# Altium PCB Arduino_DUE_V02b.PcbDoc (part 2 of 3)
Units mil, origin at the board's own origin, x right, y up, seen from the top; angles counter-clockwise.
Board outline 4416.66 x 2112 mil, 4 copper layers (Top Layer, Mid-Layer 1, Mid-Layer 2, Bottom Layer); 129 components, 175 nets, 644 pads, 366 vias.
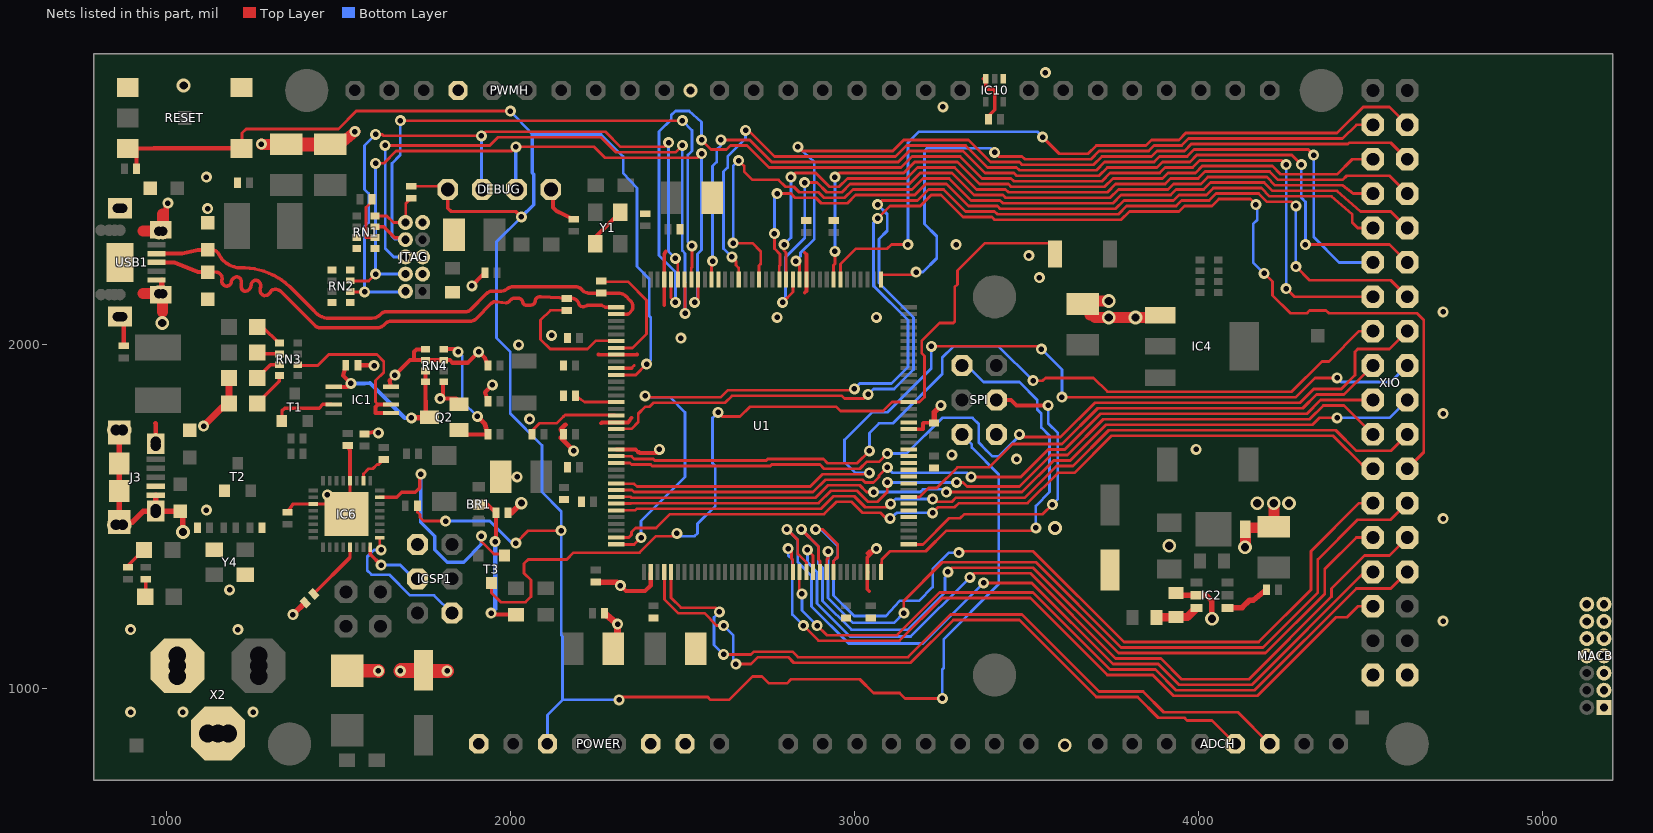
[diagram p4: the nets of this part, all layers, seen from the top]

## Via types
v1: diameter 32, hole 16, Top Layer to Bottom Layer, 313 vias
v2: diameter 40, hole 24, Top Layer to Bottom Layer, 52 vias
v3: diameter 36, hole 20, Top Layer to Bottom Layer, 1 vias

## Nets (pads, with @x,y where several pads share a name; then routed paths per layer and width w, separated by ;. In a path a pad name is that pad's centre, name@x,y a point inside that pad or via, vN(x,y) a via of type N, cw(c..) or ccw(c..) an arc to the next point about the centre after c; other vN are vias at no path point) (continued)
CMP: C31.2 IC1.5 Q2.3 RN4.3 RN4.4 | length 565.6
  Top Layer w8: IC1.5@1479.98,1877 IC1.5@1486.83,1877.35 ; Q2.3@1759.98,1787 Q2.3@1764.67,1789
  Top Layer w12: IC1.5@1479.98,1877 1525.98,1877 v1(1535.98,1887) 1513.39,1909.59 C31.2@1521.48,1940 ; RN4.3@1753.41,1923.25 RN4.4@1753.41,1891.76 1753.41,1891.57 1753.98,1787 Q2.3@1781.98,1787
  Top Layer w16: v1(1711.98,1787) 1753.98,1787 Q2.3@1759.98,1787
  Bottom Layer w12: v1(1535.98,1887) 1575.98,1887 1591.98,1888 1692.98,1787 v1(1711.98,1787)
D+: R6.1 U1.37 USB1.3 Z1.1 | length 1608.6
  Top Layer w10: Z1.1@1119.98,2211 1143.62,2211 cw(c1142.62,2191.64) 1161.98,2190.64 ccw(c1175.62,2184.64) 1169.62,2171 1169.98,2171 ccw(c1174.98,2184) 1187.98,2179 cw(c1205.98,2179) 1205.98,2197 cw(c1202.98,2182) 1217.98,2179 1217.98,2169 ccw(c1229.98,2167) 1227.98,2155 ccw(c1227.98,2173) 1245.98,2173 cw(c1260.98,2172) 1261.98,2187 cw(c1257.98,2171) 1273.98,2167 ccw(c1289.98,2159) 1281.98,2143 ccw(c1285.98,2161) 1303.98,2157 cw(c1316.71,2136.89) 1330.42,2156.35 1430.64,2056.45 ccw(c1447.44,2071.61) 1446.44,2049 1613.62,2049 ccw(c1613.62,2074) 1631.3,2056.32 1635.66,2060.68 cw(c1653.34,2043) 1653.34,2068 1882.62,2068 ccw(c1882.62,2093) 1900.3,2075.32 1944.66,2119.68 cw(c1956.92,2108.24) 1956.33,2125 1987.02,2121 ccw(c1985.02,2137.81) 1998.32,2127.34 cw(c2013.99,2115.67) 2011.16,2135 2019.98,2135 cw(c2021.98,2121) 2035.98,2123 ccw(c2045.98,2125) 2047.98,2115 2059.98,2115 ccw(c2059.98,2127) 2071.98,2127 cw(c2085.98,2125) 2087.98,2139 R6.1@2171.57,2135 ; R6.1@2161.98,2135 2163.48,2135 R6.1@2163.98,2134.5 R6.1@2171.57,2135 ; 2275.98,2109 2275.64,2109.34 ; U1.37@2307.78,2108.49 2301.98,2109 2276.46,2109 ; R6.1@2171.57,2135 2177.62,2135 cw(c2177.12,2111.21) 2194.3,2127.68 2197.66,2122.32 ccw(c2215.16,2125.93) 2205.33,2111 2211.08,2110 ccw(c2211.58,2125.55) 2213.87,2110.17 2221.71,2113.29 cw(c2225.42,2104) 2225.42,2114 2265.98,2114 2275.64,2109.34 ; 2275.64,2109.34 ccw(c2276.46,2110.16) 2276.46,2109 ; 2275.64,2109.34 ccw(c2276.46,2110.16) 2276.46,2109
  Top Layer w12: USB1.3@979.98,2239 USB1.3@971.28,2239 1023.98,2239 1091.98,2211 1119.98,2211 Z1.1@1119.98,2210.37
D-: R5.1 U1.38 USB1.2 Z2.1 | length 1600.1
  Top Layer w10: USB1.2@971.28,2264.59 982.99,2264.59 ccw(c982.99,2265.99) USB1.2@983.98,2265 ; Z2.1@1111.98,2275 Z2.1@1119.98,2275.63 ; Z2.1@1119.98,2275 1138.48,2275 cw(c1127.96,2248.38) 1154.33,2259.5 1161.33,2248.17 ccw(c1217.42,2297.78) 1213.56,2223 cw(c1220.74,2022.03) 1357.78,2169.21 ; 1357.77,2169.21 1429.34,2097.64 ccw(c1472.93,2132.41) 1466.69,2077 1597.47,2077 ccw(c1597.88,2111.04) 1621.66,2086.68 cw(c1641.75,2070) 1639.34,2096 1870.27,2096 ccw(c1871.34,2114.44) 1883.62,2100.64 1931.84,2148.86 cw(c1948.53,2131.23) 1949.19,2155.5 1973.46,2155.5 ccw(c1973.46,2180.5) 1988.73,2160.71 1992.73,2163.79 cw(c2006.54,2143.5) 2008.01,2168 2190.15,2168 cw(c2190.63,2144.47) 2209.46,2158.58 ccw(c2229.16,2175.18) 2231.16,2149.5 R5.1@2262.48,2149.5 ; U1.38@2307.78,2088.8 2338.8,2088.8 ccw(c2340.22,2097.89) 2345.64,2090.47 2354.32,2101.14 ccw(c2346.89,2106.57) 2355.98,2107.98 2355.98,2111.82 ccw(c2328.41,2109.58) 2346.32,2130.66 2336.91,2140.07 ; 2336.9,2140.08 ccw(c2314.59,2116.69) 2313.83,2149 2263.98,2149 R5.1@2263.98,2149.5 ; R5.1@2262.48,2149.5 R5.1@2263.98,2149.5 ; R5.1@2262.48,2149.5 2263.98,2147 R5.1@2263.98,2149.5
  Top Layer w12: USB1.2@973.98,2265 983.98,2265 1045.98,2265 1091.98,2275 1119.98,2275 Z2.1@1119.98,2275.63 Z2.1@1119.35,2275
DAC0(CANRX1): ADCH.5 U1.76 | length 2083.3
  Top Layer w8: U1.76@2447.55,1338.8 2447.98,1331 2447.98,1259 2487.98,1219 2563.98,1219 2599.98,1183 v1(2619.98,1183) ; v1(2655.98,1071) 2699.98,1071 2719.98,1091 2807.98,1091 2823.98,1075 3163.98,1075 3287.98,1199 3479.98,1199 3703.98,975 3823.98,975 3883.98,915 3959.98,915 3967.98,907 4039.98,907 ADCH.5@4107.98,839 ADCH.5@4103.98,843
  Bottom Layer w8: v1(2619.98,1183) 2647.98,1155 2647.98,1079 v1(2655.98,1071)
DAC1: ADCH.6 U1.77 | length 2180
  Top Layer w8: U1.77@2467.23,1338.8 2467.23,1263.75 2495.98,1235 2595.98,1235 v1(2607.98,1223) ; v1(2619.98,1099) 2699.98,1099 2707.98,1107 2819.98,1107 2835.98,1091 3155.98,1091 3279.98,1215 3487.98,1215 3711.98,991 3839.98,991 3899.98,931 4115.98,931 ADCH.6@4207.98,839
  Bottom Layer w8: v1(2607.98,1223) 2591.98,1207 2591.98,1127 v1(2619.98,1099)
EEXTINT: U1.25
EEXTINTA: MACB.8
EMDC: U1.123
EMDCA: MACB.14
EMDIO: U1.127
EMDIOA: MACB.12
EN: IC2.4 R10.2 | length 133.3
  Top Layer w16: IC2.4@4085.26,1233.6 4086.66,1235 4127.98,1235 4149.57,1256.59 4159.98,1256.59 R10.2@4198.48,1287
ERASE_CMD: IC6.23 T3.3 | length 700.9
  Top Layer w8: v1(1915.98,1443) 1915.98,1427 1951.98,1391 1978.98,1391 T3.3@1982.98,1387
  Top Layer w10: IC6.23@1620.44,1556.21 1669.19,1556.21 1683.98,1571 1723.98,1571 1735.98,1583 1735.98,1619 v1(1739.98,1623)
  Bottom Layer w10: v1(1739.98,1623) 1739.98,1483 1779.98,1443 1779.98,1403 1815.98,1367 1863.98,1367 1915.98,1419 v1(1915.98,1443)
ERASE_S: ERASE.2 T3.1 U1.130 | length 2610
  Top Layer w8: T3.1@1944.98,1307 1944.98,1278 1971.98,1251 2043.98,1251 2059.98,1267 2059.98,1315 2039.98,1335 2039.98,1363 2051.98,1375 2163.98,1375 2183.98,1395 2375.98,1395 2423.98,1443 2475.98,1443 v1(2483.98,1451) ; v1(2603.98,1803) 2615.98,1791 2667.98,1791 2695.98,1819 2947.98,1819 2959.98,1807 3083.98,1807 3109.88,1832.9 U1.130@3158.18,1832.9 3189.88,1832.9 3203.98,1847 3203.98,1967 3195.98,1975 3195.98,2011 3247.98,2063 3287.98,2063 3291.98,2067 3291.98,2167 3299.98,2175 3299.98,2215 3379.98,2295 3563.98,2295 3583.98,2275 ERASE.2@3583.98,2263
  Bottom Layer w8: v1(2483.98,1451) 2487.98,1451 2495.98,1443 2535.98,1443 2543.98,1451 2543.98,1479 2595.98,1531 2595.98,1647 2587.98,1655 2587.98,1787 v1(2603.98,1803)
ERX_DV: U1.119
ERX_DVA: MACB.10
ERX_ER: U1.122
ERX_ERA: MACB.13
ERXD0: U1.120
ERXD0A: MACB.9
ERXD1: U1.121
ERXD1A: MACB.11
ETX_CLK: U1.113
ETX_CLKA: MACB.1
ETX_EN: U1.114
ETX_ENA: MACB.3
ETXD0: U1.115
ETXD0A: MACB.5
ETXD1: U1.118
ETXD1A: MACB.7
FB: IC2.3 R11.1 R12.2 | length 126.7
  Top Layer w24: R12.2@3878.98,1207 3934.98,1207 R11.1@3935.98,1208 3969.11,1208 IC2.3@3994.7,1233.6
GATE_CMD: IC1.7 T1.3 | length 188.1
  Top Layer w8: IC1.7@1479.98,1826 IC1.7@1486.83,1826.17
  Top Layer w10: T1.3@1334.98,1778 1335.98,1779 1335.98,1807 1343.98,1815 1443.98,1815 1454.98,1826 IC1.7@1479.98,1826
GND: C1.- C2.- C3.- C4.1 C5.1 C6.1 C7.1 C8.1 C9.1 C10.1 C11.- C12.1 C13.1 C14.1 C15.1 C16.1 C17.1 C18.1 C19.1 C21.2 C22.2 C23.2 C24.2 C25.2 C26.2 C27.- C28.2 C29.- C30.1 C31.1 C32.1 C33.- C34.1 C35.- C36.2 C37.2 C38.2 C39.2 C40.2 C41.- D1.A D4.P$2 DEBUG.1 IC1.4 IC2.2 IC4.1 IC6.3 IC6.28 IC6.33 IC10.1 IC10.3 ICSP1.6 J3.P5 J3.P$1 J3.P$2 J3.P$3 J3.P$4 J3.P$5 J3.P$6 J3.P$7 J3.P$8 J3.S1 J3.S2 J3.S3 J3.S4 J3.S5 J3.S6 JTAG.3 JTAG.5 JTAG.9 L.C ON.C PC1.- PC2.- POWER.6 POWER.7 PWMH.7 Q2.2 R2.1 R7.1 R8.1 R11.2 R18.2 RESET.1 RESET.2 RN1.1 RN1.2 RN1.7 RN1.8 RN2.1 RN2.4 RN2.5 RN2.8 RN4.1 RN4.2 RN4.5 RN4.7 SPI.6 T2.3 U1.12 U1.33 U1.44 U1.46 U1.54 U1.58 U1.74 U1.106 U1.126 USB1.5 USB1.P$1 USB1.P$2 USB1.P$3 USB1.P$4 USB1.P$5 USB1.P$6 USB1.P$7 USB1.P$8 USB1.P$9 USB1.P$10 USB1.P$11 USB1.S1 USB1.S2 USB1.S3 USB1.S4 X2.1 X2.3 XIO.35 XIO.36 Y1.2 Y1.4 Y4.2 Y4.4 Z1.2 Z2.2 Z3.1 Z4.1 Z5.1 | length 6258.5
  Top Layer w8: RESET.2@1215.98,2771 RESET.2@1218.33,2747.58 ; R2.1@1597.48,2423 1597.48,2416.5 1579.98,2399 1579.98,2311 1580.23,2311.25 RN1.2@1606.55,2311.25 ; 2352.3,1931.32 2359.98,1939 ; U1.33@2447.55,2189.2 U1.33@2447.98,2195 ; 3047.98,1399 3055.98,1407 v1(3063.98,1407) ; U1.126@3158.18,1754.16 3159.82,1754.16 U1.126@3159.98,1754
  Top Layer w10: USB1.S2@983.09,2144.51 987.98,2147.5 USB1.P$10@987.98,2147 ; C36.2@1351.98,1512.5 1367.92,1536.53 IC6.3@1427.52,1536.53 1498.45,1536.53 1503.98,1531 1503.98,1527 IC6.33@1523.98,1507 ; IC6.33@1533.82,1507 IC6.28@1533.82,1603.46 ; U1.106@3038.1,1336.88 3038.1,1313.12 ; 3043.98,1283 3038.1,1288.88 3038.1,1313.12 ; v1(3063.98,1407) 3037.98,1381 3037.98,1313 3038.1,1313.12 ; IC10.3@3374.52,2772.46 IC10.3@3382.39,2772.46 3382.39,2748.59 3387.98,2743 3403.98,2743 3407.98,2739 3407.98,2683 3390.48,2665.5 C37.2@3390.48,2655
  Top Layer w11: 2255.98,1971 2256.29,1970.69 U1.44@2307.78,1970.69 2367.67,1970.69 2367.98,1971 ; 2263.98,1771 2266.82,1773.84 U1.54@2307.78,1773.84 2342.82,1773.84 2351.98,1787 ; U1.58@2307.78,1695.1 2363.88,1695.1 2371.98,1687 ; U1.46@2307.78,1931.32 2352.3,1931.32 ; 2373.98,1687 2375.98,1685 v1@2431.98,1685 ; U1.74@2408.18,1334.8 U1.74@2408.18,1338.8 ; 2447.48,2115 2447.48,2263 ; U1.33@2447.55,2189.2 2447.55,2243.07 2447.48,2263 ; 2451.98,2271 2447.48,2263 ; 2855.98,2151 2860.93,2155.95 U1.12@2860.93,2189.2 2860.93,2262.05 2855.98,2267 ; 3037.98,1393 3043.98,1399 3047.98,1399 ; U1.106@3038.1,1336.88 U1.106@3038.1,1338.8 ; U1.126@3151.98,1754 3159.98,1754 3199.98,1754 3199.98,1771 3201.48,1772.5 C8.1@3231.98,1772.5
  Top Layer w12: C28.2@875.98,1996.5 USB1.P$5@875.98,2068.56 ; C30.1@1526.98,1706.5 1533.82,1691.57 IC6.28@1533.82,1603.46 ; C31.1@1556.48,1940 1598.98,1940 v1(1603.98,1939) ; C38.2@1575.98,1740.5 1613.57,1748.59 v1(1615.98,1743) ; IC1.4@1653.17,1877.35 1649.17,1896.19 v1(1663.98,1911) 1707.73,1954.75 RN4.2@1753.41,1954.75 ; RN4.1@1753.41,1986.24 1727.22,1986.24 1719.98,1979 1719.98,1959 1723.98,1955 1753.15,1955 RN4.2@1753.41,1954.75 ; RN4.5@1806.55,1891.76 1804.74,1891.76 1803.98,1891 1803.98,1851 v1(1795.98,1843) 1842.69,1843 Q2.2@1851.29,1826.4 ; v1(1887.98,2171) 1917.98,2201 C25.2@1926.48,2209 ; C23.2@1934.48,1835 1926.39,1861.41 v1(1947.98,1883) ; C24.2@1934.48,1939 1926.39,1960.59 v1(1907.98,1979) 1875.98,1947 1831.98,1947 1824.23,1954.75 RN4.7@1806.55,1954.75 RN4.2@1753.41,1954.75 ; DEBUG.1@2117.98,2451 2123.98,2457 2123.98,2399 2134.39,2388.59 C22.2@2183.98,2364.5 ; Y1.2@2246.56,2293.72 2246.56,2311.44 Y1.4@2319.4,2384.28 ; v1(2319.98,1299) 2335.98,1283 2391.98,1283 2408.18,1299.2 U1.74@2408.18,1334.8 ; 2371.98,1687 2373.98,1687
  Top Layer w14: 967.98,1771 968.98,1770 J3.S3@968.98,1712 ; 2159.98,1767 2146.39,1753.41 C15.1@2154.48,1739 2146.39,1728.59 v1(2183.98,1691)
  Top Layer w16: J3.S1@862.98,1744 J3.S5@862.98,1654 J3.S6@862.98,1574 J3.S2@862.98,1484 900.98,1484 931.98,1515 967.98,1515 J3.S4@968.98,1516 ; J3.P5@968.98,1562 J3.S4@968.98,1516 ; USB1.P$10@979.98,2151 ccw(c979.48,2158.5) 986.98,2159 USB1.5@986.98,2187 ; USB1.P$8@983.98,2351 999.98,2351 v1@999.98,2411 ; v2(1047.98,1455) 1047.98,1503 Z4.1@1039.98,1515.63 1039.61,1516 J3.S4@968.98,1516 ; v1(1367.98,1215) R18.2@1403.61,1250.63 ; RN2.5@1534.55,2122.76 1535.98,2122.76 RN2.5@1535.98,2123 ; C34.1@1993.48,1511 2003.98,1511 v3(2031.98,1539) ; C10.1@2247.98,1309.5 2309.48,1309.5 v1(2319.98,1299) ; C8.1@3231.98,1772.5 3231.98,1803 v1(3251.98,1823) ; R11.2@3935.98,1278 3942.98,1271 IC2.2@3994.7,1271 4023.98,1271 4039.98,1255 v2(4039.98,1203)
  Top Layer w20: v1(1107.98,1763) 1161.64,1816.66 ON.C@1181.64,1829 L.C@1181.64,1903 ; C18.1@2273.48,1219 v1(2311.98,1187) 2311.98,1127.94 C1.-@2299.04,1115 ; v1@2317.57,1301.41 v1(2319.98,1299)
  Top Layer w24: USB1.P$8@983.98,2351 983.98,2379 987.98,2379
  Top Layer w32: 931.98,2330 987.98,2330 987.98,2379 ; X2.3@975.98,1067 X2.3@1091.98,1067 ; USB1.P$10@979.98,2151 cw(c976.48,2151.5) 975.98,2148 931.98,2148 USB1.P$10@987.98,2147 ; 987.98,2095 USB1.P$10@987.98,2147 ; USB1.P$10@987.98,2151 USB1.P$10@987.98,2147 ; X2.1@1147.98,811 X2.1@1147.98,927 ; v1(1275.98,2583) 1276.92,2582.06 C35.-@1344.92,2582.06 ; C27.-@1475.98,2582.06 1503.98,2583 v1(1547.98,2619) ; v2(3739.98,2127) 3679.98,2127 3675.04,2130.06 C29.-@3663.98,2118.06 3683.98,2107 3684.92,2086.06 3692.92,2086.06 3699.98,2079 v2(3739.98,2079) v2(3817.98,2079) 3887.98,2079 3887.98,2083 3888.98,2087 IC4.1@3889.98,2086 ; v2(4135.98,1411) 4136.94,1407.96 D4.P$2@4136.94,1463 4141.89,1466.06 C41.-@4219.98,1470.06 v2(4219.98,1539)
  Top Layer w40: USB1.S2@983.09,2144.51 ccw(c984.09,2148.4) USB1.P$10@987.98,2147.4 ; USB1.S1@983.09,2333.49 cw(c984.09,2329.6) 987.98,2330.6 USB1.P$8@987.98,2330 ; C35.-@1344.92,2582.06 C35.-@1347.98,2582.06 C27.-@1475.98,2582.06 ; D1.A@1525.98,1051.61 1615.37,1051.61 v1(1615.98,1051) ; PC1.-@1746.98,1053.49 1681.49,1053.49 v1(1679.98,1051) v1(1815.98,1051) ; USB1.P$8@987.98,2330 ccw(c991.48,2330.5) 991.98,2327 987.98,2327 USB1.P$8@987.98,2330
  other v1: 895.98,931 1047.98,931 1251.98,931 895.98,1171 1207.98,1171 4711.98,1196 1183.98,1287 4711.98,1494 1115.98,1519 1467.98,1563 2019.98,1615 3471.98,1667 3283.98,1679 2432.98,1695 3993.98,1695 2055.98,1783 4711.98,1799 2023.98,1999 2495.98,2019 2119.98,2027 2775.98,2079 3063.98,2079 4711.98,2095 3537.98,2195 3507.98,2259 3295.98,2291 1119.98,2395 1003.98,2411 1115.98,2487 3257.98,2691 3555.98,2791
  other v2: 3611.98,835 3915.98,1415 3583.98,1467 4171.98,1539 4263.98,1539 987.98,2063 2523.98,2739 1049.98,2753
JTAG_RESET: JTAG.10 R1.1 RN1.4 | length 176.4
  Top Layer w8: RN1.4@1606.55,2374.24 1640.74,2374.24 1659.98,2355 JTAG.10@1694.98,2355 ; R1.1@1711.98,2425.5 1695.98,2411 JTAG.10@1695.98,2356 ; JTAG.10@1694.98,2355 1695.98,2355 JTAG.10@1695.98,2356 ; JTAG.10@1694.98,2355 JTAG.10@1695.98,2356
JTAG_TCK: DEBUG.2 JTAG.4 RN2.7 U1.28 | length 2111.6
  Top Layer w8: RN2.7@1534.55,2185.75 1539.98,2185 1587.98,2185 v1(1607.98,2205) ; v1(1607.98,2527) 1631.98,2527 1667.98,2563 2003.98,2563 v1(2015.98,2575) 2243.98,2575 2275.98,2543 2543.98,2543 v1(2555.98,2555) ; v1(2535.98,2123) 2545.97,2132.99 U1.28@2545.97,2189.2
  Bottom Layer w8: v1(1607.98,2527) v1(1607.98,2205) JTAG.4@1694.98,2205 ; v1(2535.98,2123) 2543.98,2131 2543.98,2263 2555.98,2275 v1(2555.98,2555)
  Bottom Layer w10: v1(2015.98,2575) 2015.98,2465 DEBUG.2@2017.98,2451
JTAG_TDI: JTAG.8 RN1.3 U1.29 | length 1799.9
  Top Layer w8: v1(1679.98,2651) v1(2499.98,2651) ; U1.29@2526.29,2189.2 2525.98,2222 2527.98,2224 v1(2527.98,2287)
  Top Layer w10: RN1.3@1606.55,2342.75 1632.23,2342.75 1663.98,2311 1688.98,2311 JTAG.8@1694.98,2305
  Bottom Layer w8: v1(1679.98,2651) 1679.98,2551 1655.98,2527 1655.98,2315 1663.98,2307 1695.98,2307 1694.98,2306 JTAG.8@1694.98,2305 ; v1(2499.98,2651) 2527.98,2623 2527.98,2563 2515.98,2551 2515.98,2299 v1(2527.98,2287)
JTAG_TDO: JTAG.6 U1.30 | length 1860.5
  Top Layer w8: v1(1635.98,2579) 1939.98,2579 1963.98,2603 2263.98,2603 2307.98,2559 2479.98,2559 v1(2499.98,2579) ; U1.30@2506.6,2189.2 2505.98,2187.82 2505.98,2179 2507.98,2179 v1(2507.98,2091)
  Bottom Layer w8: v1(1635.98,2579) 1635.98,2280 1660.98,2255 JTAG.6@1694.98,2255 ; v1(2499.98,2579) 2499.98,2273 2507.98,2265 v1(2507.98,2091)
JTAG_TMS: DEBUG.3 JTAG.2 RN2.6 U1.31 | length 2093.4
  Top Layer w8: RN2.6@1534.55,2154.25 1539.98,2153 v1(1575.98,2153) ; v1(1607.98,2611) 1627.98,2611 1631.98,2607 v1(1915.98,2607) 1927.98,2619 2275.98,2619 2319.98,2575 2447.98,2575 v1(2459.98,2587) ; v1(2479.98,2251) 2486.98,2244 2486.98,2196 U1.31@2486.92,2189.2
  Bottom Layer w8: v1(1607.98,2611) 1575.98,2579 1575.98,2451 1587.98,2439 1587.98,2355 1575.98,2343 v1(1575.98,2153) 1693.98,2153 JTAG.2@1694.98,2155 ; v1(1915.98,2607) 1915.98,2465 DEBUG.3@1917.98,2451 ; v1(2459.98,2587) 2459.98,2271 v1(2479.98,2251) ; JTAG.2@1694.98,2155 1695.98,2155 1695.98,2154 JTAG.2@1694.98,2155
L13: IC1.1 IC1.2 RN3.6 | length 521.5
  Top Layer w8: RN3.6@1381.55,1941.25 1390.23,1941.25 1395.98,1939 1439.98,1939 1471.98,1971 1611.98,1971 1631.98,1951 1631.98,1919 1607.98,1895 1607.98,1833.33 1615.15,1826.17 ; IC1.1@1647.98,1801 IC1.1@1653.17,1800.57
  Top Layer w12: IC1.1@1647.98,1801 1607.98,1801 1607.98,1819 1615.15,1826.17 IC1.2@1653.17,1826.17
MASTER-RESET: C20.1 DEBUG.4 POWER.3 R1.2 R23.2 RESET.3 RESET.4 SPI.5 U1.47 | length 7301.7
  Top Layer w8: 1167.98,2571 RESET.4@1218.33,2570.42 1219.98,2572.06 1219.98,2615 1231.98,2627 1499.98,2627 1551.98,2679 v1(1999.98,2679) ; R1.2@1711.98,2460.5 DEBUG.4@1808.39,2460.59 ; R23.2@1729.48,1531 1729.48,1513.5 1737.57,1505.41 1737.57,1497.41 1747.98,1487 v1(1811.98,1487) ; v1(2015.98,1423) 2051.98,1459 v1(2147.98,1459) ; U1.47@2307.78,1911.64 2364.62,1911.64 v1(2395.98,1943) ; v1(2315.98,967) 2323.98,975 2573.98,975 2581.98,967 2635.98,967 2703.98,1035 2731.98,1035 2751.98,1015 2803.98,1015 2815.98,1027 3015.98,1027 3055.98,987 3131.98,987 3147.98,971 v1(3255.98,971) ; SPI.5@3311.98,1739 SPI.5@3312.98,1739
  Top Layer w10: DEBUG.4@1808.39,2460.59 DEBUG.4@1817.98,2451 1817.98,2397 1827.98,2387 2015.98,2387 v1(2031.98,2371)
  Top Layer w12: RESET.3@887.63,2570.42 RESET.3@907.98,2570.42 ; C20.1@913.48,2511 913.48,2564.92 RESET.3@907.98,2570.42 ; RESET.4@1218.33,2570.42 1218.33,2575 1203.98,2575 RESET.4@1203.98,2571 ; RESET.4@1219.98,2571 RESET.4@1203.98,2571 ; RESET.3@907.98,2570.42 963.98,2570.42 963.98,2571 1167.98,2571 RESET.4@1203.98,2571
  Bottom Layer w8: v1(1811.98,1487) 1939.98,1487 2003.98,1423 v1(2015.98,1423) ; v1(1999.98,2679) 2063.98,2611 2263.98,2611 2327.98,2547 2327.98,2499 2367.98,2455 2367.98,2227 2403.98,2191 2403.98,2083 2407.98,2079 2407.98,1955 v1(2395.98,1943) ; v1(2031.98,2371) 1959.98,2299 1959.98,2019 1999.98,1979 1999.98,1799 2091.98,1707 2091.98,1571 2147.98,1515 v1(2147.98,1459) 2147.98,1155 2151.98,1151 2151.98,967 ; POWER.3@2107.98,839 2107.98,923 2151.98,967 ; v1(2315.98,967) 2151.98,967 ; v1(3255.98,971) 3255.98,1055 3259.98,1059 3259.98,1143 3419.98,1303 3419.98,1623 3341.98,1701 3341.98,1709 3311.98,1739 SPI.5@3312.98,1739
  Bottom Layer w10: v1(2031.98,2371) 2067.98,2407 2067.98,2495 2063.98,2499 2063.98,2611
MISO: SPI.1 U1.108 | length 1187.3
  Top Layer w8: U1.108@3077.47,1338.8 3079.98,1375 3103.98,1399 3207.98,1399 3267.98,1459 3519.98,1459 v1(3527.98,1467)
  Bottom Layer w8: SPI.1@3311.98,1939 SPI.1@3312.98,1939 3327.98,1939 3375.98,1891 3479.98,1891 3531.98,1839 3531.98,1811 3543.98,1799 3543.98,1759 3567.98,1735 3567.98,1571 3527.98,1531 v1(3527.98,1467)
MISO2: IC6.17 ICSP1.1 | length 422.2
  Top Layer w8: IC6.17@1620.44,1438.1 1620.44,1406.54 v1(1623.98,1403)
  Bottom Layer w8: v1(1623.98,1403) 1603.98,1403 1583.98,1383 1583.98,1343 1595.98,1331 1647.98,1331 1707.98,1271 1777.98,1271 ICSP1.1@1829.98,1219
MOSI: SPI.4 U1.109 | length 934.2
  Top Layer w8: U1.109@3158.18,1419.51 3159.98,1419 3199.98,1419 3275.98,1495 3307.98,1495 3319.98,1507 3547.98,1507 v1(3575.98,1535) ; SPI.4@3411.98,1839 SPI.4@3412.98,1839 3412.98,1840 SPI.4@3411.98,1839
  Top Layer w12: SPI.4@3411.98,1839 3455.98,1839 3471.98,1823 v1(3563.98,1823)
  Bottom Layer w8: v1(3563.98,1823) 3563.98,1771 3591.98,1743 3591.98,1551 v1(3575.98,1535)
MOSI2: IC6.16 ICSP1.4 | length 187
  Top Layer w10: IC6.16@1592.88,1410.54 1592.88,1390.1 v1(1623.98,1359)
  Bottom Layer w8: v1(1623.98,1359) 1677.98,1359 1679.98,1359 1719.98,1319 ICSP1.4@1729.98,1319
N$1: IC6.26 R21.1 | length 96.7
  Top Layer w8: IC6.26@1573.19,1603.46 1573.19,1624.21 1587.98,1639 1599.98,1639 1611.98,1651 1617.57,1651 R21.1@1631.98,1665.5
NetBR1_2: BR1.2 C34.2 JR1.2 L3.1 | length 443.3
  Top Layer w12: JR1.2@1907.98,1528.5 BR1.2@1907.98,1535.41 1934.07,1535.41 C34.2@1958.48,1511 1958.48,1425.5 v1(1955.98,1427) ; v1(1943.98,1219) 1947.98,1215 L3.1@2016.67,1215
  Bottom Layer w12: v1(1943.98,1219) 1955.98,1231 v1(1955.98,1427)
NetIC6_13: IC6.13 R18.1 | length 178.9
  Top Layer w10: R18.1@1428.35,1275.37 1533.82,1380.84 IC6.13@1533.82,1410.54
NetJ3_P4: J3.P4
NetL_A: L.A RN3.3 | length 79.9
  Top Layer w10: L.A@1264.32,1903 1302.57,1941.25 RN3.3@1328.41,1941.25
NetON_A: ON.A RN3.4 | length 107.3
  Top Layer w10: ON.A@1264.32,1829 1328.41,1893.09 RN3.4@1328.41,1909.76
NetPOWER_1: POWER.1
NetQ2_1: Q2.1 R3.2 RN4.8 | length 417.9
  Top Layer w8: RN4.8@1806.55,1986.24 RN4.8@1807.98,1987
  Top Layer w11: Q2.1@1851.29,1751.6 1847.98,1754.91 1847.98,1755 1863.98,1739 Q2.1@1875.98,1739
  Top Layer w12: RN4.8@1807.98,1987 1839.98,1987 v1(1847.98,1979) ; Q2.1@1875.98,1739 R3.2@1934.48,1739 R3.2@1935.98,1739
  Top Layer w14: v1(1903.98,1791) 1926.39,1768.59 R3.2@1934.48,1739
  Bottom Layer w8: v1(1847.98,1979) 1859.98,1967 1859.98,1835 v1(1903.98,1791)
NetR4_1: R4.1 U1.53 | length 275.8
  Top Layer w8: R4.1@2062.48,1739 2063.98,1739 2063.98,1751 2083.98,1771 2133.98,1771 2153.98,1791 2154.98,1791 2158.98,1795 2303.98,1795 U1.53@2307.78,1793.53
NetR5_2: R5.2 U1.43 | length 380.5
  Top Layer w8: R5.2@2263.98,2184.5 R5.2@2254.48,2183 ; U1.43@2307.78,1990.38 2355.36,1990.38 2395.98,2031 2395.98,2129 2341.98,2183 R5.2@2254.48,2183 ; R5.2@2253.98,2183 R5.2@2254.48,2183 ; R5.2@2253.98,2183 R5.2@2254.48,2183 ; R5.2@2253.98,2183 R5.2@2254.48,2183 ; R5.2@2253.98,2183 R5.2@2254.48,2183 ; R5.2@2253.98,2183 R5.2@2254.48,2183 ; R5.2@2253.98,2183 R5.2@2254.48,2183 ; R5.2@2253.98,2183 R5.2@2254.48,2183 ; R5.2@2253.98,2183 R5.2@2254.48,2183
NetR6_2: R6.2 U1.42 | length 385.3
  Top Layer w8: R6.2@2163.98,2099.5 2116.48,2099.5 2087.98,2071 2087.98,2015 2115.98,1987 2223.98,1987 2247.98,2011 2303.98,2011 U1.42@2307.78,2010.06
NetR8_2: R8.2 U1.51 | length 123.9
  Top Layer w8: R8.2@2189.48,1851 2215.67,1832.9 U1.51@2307.78,1832.9
NetR14_2: R14.2 TX1.A | length 51.1
  Top Layer w10: TX1.A@938.64,1267 939.98,1268.34 R14.2@939.98,1317.5
NetR15_2: R15.2 RX1.A | length 73.4
  Top Layer w10: R15.2@887.98,1352.5 887.98,1356.34 RX1.A@934.64,1403 935.98,1403 RX1.A@934.39,1404.59
NetRN3_1: RN3.1 RX.A | length 83.6
  Top Layer w10: RX.A@1264.32,2051 1279.07,2052.24 RN3.1@1328.41,2004.24
NetRN3_2: RN3.2 TX.A | length 66.2
  Top Layer w10: TX.A@1264.32,1977 cw(c1268.07,1969) 1276.07,1972.75 RN3.2@1328.41,1972.75
PIN22: U1.1 XIO.3 | length 1886.7
  Top Layer w8: U1.1@3077.47,2189.2 3075.98,2203 3171.98,2203 v1(3179.98,2211) ; v1(3407.98,2559) 3419.98,2547 3487.98,2547 3495.98,2539 3687.98,2539 3711.98,2563 3855.98,2563 3871.98,2579 3951.98,2579 3971.98,2599 4419.98,2599 4459.98,2639 XIO.3@4507.98,2639
  Bottom Layer w8: v1(3179.98,2211) 3199.98,2211 3239.98,2251 3239.98,2315 3203.98,2351 3203.98,2563 3211.98,2571 3395.98,2571 v1(3407.98,2559)
PIN23: U1.7 XIO.4 | length 2130.1
  Top Layer w8: U1.7@2959.36,2189.2 2959.98,2195 2959.98,2234 3004.98,2279 3095.98,2279 3107.98,2291 v1(3155.98,2291) ; v1(3547.98,2603) 3595.98,2555 3679.98,2555 3703.98,2579 3847.98,2579 3863.98,2595 3943.98,2595 3963.98,2615 4403.98,2615 4479.98,2691 4555.98,2691 XIO.4@4607.98,2639
  Bottom Layer w8: v1(3155.98,2291) 3155.98,2587 3187.98,2619 3531.98,2619 v1(3547.98,2603)
PIN24: U1.8 XIO.5 | length 1964.7
  Top Layer w8: U1.8@2939.67,2189.2 2939.67,2230.69 2943.98,2235 v1(2943.98,2271) ; v1(2943.98,2487) 2955.98,2499 3143.98,2499 3175.98,2531 3299.98,2531 3363.98,2467 3447.98,2467 3455.98,2459 3727.98,2459 3751.98,2483 3895.98,2483 3911.98,2499 3991.98,2499 4011.98,2519 4215.98,2519 4239.98,2495 4403.98,2495 4447.98,2539 XIO.5@4507.98,2539
  Bottom Layer w8: v1(2943.98,2271) v1(2943.98,2487)
PIN25: U1.13 XIO.6 | length 2300.3
  Top Layer w8: v1(2829.98,2243) 2840.98,2232 2840.98,2194 U1.13@2841.25,2189.2 ; v1(2835.98,2575) 2847.98,2563 3111.98,2563 3143.98,2595 3331.98,2595 3395.98,2531 3479.98,2531 3487.98,2523 3695.98,2523 3719.98,2547 3863.98,2547 3879.98,2563 3959.98,2563 3979.98,2583 4435.98,2583 4439.98,2587 4559.98,2587 XIO.6@4607.98,2539
  Bottom Layer w8: v1(2829.98,2243) 2843.98,2257 2843.98,2267 2883.98,2307 2883.98,2531 v1(2835.98,2575)
PIN26: U1.14 XIO.7 | length 2212.4
  Top Layer w8: v1(2791.98,2123) 2821.56,2152.58 U1.14@2821.56,2189.2 ; v1(2855.98,2471) 2891.98,2471 2919.98,2443 2963.98,2443 2987.98,2467 3159.98,2467 3191.98,2499 3283.98,2499 3347.98,2435 3431.98,2435 3439.98,2427 3743.98,2427 3767.98,2451 3911.98,2451 3927.98,2467 4007.98,2467 4027.98,2487 4199.98,2487 4223.98,2463 4419.98,2463 4451.98,2439 XIO.7@4507.98,2439
  Bottom Layer w8: v1(2791.98,2123) 2799.98,2131 2799.98,2254 2855.98,2310 v1(2855.98,2471)
PIN27: U1.15 XIO.8 | length 2236.7
  Top Layer w8: v1(2795.98,2291) 2795.98,2274 2801.88,2268.1 U1.15@2801.88,2189.2 U1.15@2801.88,2188.9 ; v1(2815.98,2487) 2827.98,2499 2887.98,2499 2927.98,2459 2955.98,2459 2979.98,2483 3151.98,2483 3183.98,2515 3291.98,2515 3355.98,2451 3439.98,2451 3447.98,2443 3735.98,2443 3759.98,2467 3903.98,2467 3919.98,2483 3999.98,2483 4019.98,2503 4207.98,2503 4231.98,2479 4419.98,2479 4431.98,2491 4555.98,2491 XIO.8@4607.98,2439
  Bottom Layer w8: v1(2795.98,2291) 2815.98,2311 v1(2815.98,2487)
PIN28: U1.16 XIO.9 | length 2146.1
  Top Layer w8: v1(2767.98,2323) 2767.98,2279 2784.19,2262.79 2783.98,2258.79 2783.98,2231 2781.98,2229 2781.98,2187.2 U1.16@2782.19,2189.2 ; v1(2775.98,2439) 2815.98,2439 2827.98,2427 2887.98,2427 2903.98,2411 2979.98,2411 3003.98,2435 3175.98,2435 3207.98,2467 3267.98,2467 3331.98,2403 3415.98,2403 3423.98,2395 3759.98,2395 3783.98,2419 3927.98,2419 3943.98,2435 4023.98,2435 4043.98,2455 4183.98,2455 4207.98,2431 4387.98,2431 4447.98,2379 4447.98,2355 4463.98,2339 XIO.9@4507.98,2339
  Bottom Layer w8: v1(2767.98,2323) 2767.98,2431 v1(2775.98,2439)
PIN29: U1.19 XIO.10 | length 2548.9
  Top Layer w8: v1(2647.98,2295) 2703.98,2295 2727.98,2271 2727.98,2235 2723.14,2230.16 U1.19@2723.14,2189.2 ; v1(2663.98,2535) 2679.98,2519 2679.98,2503 2703.98,2479 2779.98,2479 2799.98,2459 2823.98,2459 2839.98,2443 2895.98,2443 2911.98,2427 2971.98,2427 2995.98,2451 3167.98,2451 3199.98,2483 3275.98,2483 3339.98,2419 3423.98,2419 3431.98,2411 3751.98,2411 3775.98,2435 3919.98,2435 3935.98,2451 4015.98,2451 4035.98,2471 4191.98,2471 4215.98,2447 4403.98,2447 4471.98,2387 4559.98,2387 XIO.10@4607.98,2339
  Bottom Layer w8: v1(2647.98,2295) 2647.98,2519 v1(2663.98,2535)
PIN30: U1.22 XIO.11 | length 2683.9
  Top Layer w8: v1(2643.98,2255) 2655.98,2243 2655.98,2231 2663.98,2223 U1.22@2663.98,2187 ; v1(2683.98,2623) 2691.98,2623 2767.98,2547 3119.98,2547 3151.98,2579 3323.98,2579 3387.98,2515 3471.98,2515 3479.98,2507 3703.98,2507 3727.98,2531 3871.98,2531 3887.98,2547 3967.98,2547 3987.98,2567 4319.98,2567 v1(4335.98,2551) ; U1.22@2663.98,2187 U1.22@2664.08,2189.2 2664.08,2187.1 U1.22@2663.98,2187
  Bottom Layer w8: v1(2643.98,2255) 2619.98,2279 2619.98,2503 2631.98,2515 2631.98,2547 2683.98,2599 v1(2683.98,2623) ; v1(4335.98,2551) 4335.98,2313 4409.98,2239 XIO.11@4507.98,2239
PIN31: U1.26 XIO.12 | length 2765.5
  Top Layer w8: U1.26@2585.34,2189.2 2584.98,2200 2584.98,2240 v1(2587.98,2243) ; v1(2611.98,2595) 2695.98,2595 2759.98,2531 3127.98,2531 3159.98,2563 3315.98,2563 3379.98,2499 3463.98,2499 3471.98,2491 3711.98,2491 3735.98,2515 3879.98,2515 3895.98,2531 3975.98,2531 3995.98,2551 4271.98,2551 v1(4299.98,2523) ; v1(4311.98,2291) 4555.98,2291 XIO.12@4607.98,2239
  Bottom Layer w8: v1(2587.98,2243) 2587.98,2519 2599.98,2531 2599.98,2567 2611.98,2579 v1(2611.98,2595) ; v1(4299.98,2523) 4299.98,2427 4311.98,2415 v1(4311.98,2291)
PIN32: U1.32 XIO.13 | length 3249.3
  Top Layer w8: U1.32@2467.23,2189.2 2467.23,2135.75 v1(2479.98,2123) ; v1(2555.98,2595) 2583.98,2567 2627.98,2567 2639.98,2579 2687.98,2579 2751.98,2515 3135.98,2515 3167.98,2547 3307.98,2547 3371.98,2483 3455.98,2483 3463.98,2475 3719.98,2475 3743.98,2499 3887.98,2499 3903.98,2515 3983.98,2515 4003.98,2535 4243.98,2535 v1(4255.98,2523) ; v1(4255.98,2163) 4279.98,2139 XIO.13@4507.98,2139 XIO.13@4511.98,2139
  Bottom Layer w8: v1(2479.98,2123) 2479.98,2211 2431.98,2259 2431.98,2619 2467.98,2655 2467.98,2667 2479.98,2679 2519.98,2679 2555.98,2647 v1(2555.98,2595) ; v1(4255.98,2163) v1(4255.98,2523)
PIN33: U1.55 XIO.14 | length 3339.4
  Top Layer w8: U1.55@2307.78,1754.16 2311.98,1755 2351.98,1755 2371.98,1775 2371.98,1799 2391.98,1819 2403.98,1819 2415.98,1831 2623.98,1831 2643.98,1851 2963.98,1851 2971.98,1843 3027.98,1843 v1(3039.98,1855) ; v1(3067.98,2407) 3079.98,2419 3183.98,2419 3215.98,2451 3259.98,2451 3323.98,2387 3407.98,2387 3415.98,2379 3767.98,2379 3791.98,2403 3935.98,2403 3951.98,2419 4031.98,2419 4051.98,2439 4175.98,2439 4199.98,2415 4271.98,2415 v1(4283.98,2403) ; v1(4283.98,2227) 4323.98,2187 4559.98,2187 XIO.14@4607.98,2139
  Bottom Layer w8: v1(3039.98,1855) 3055.98,1871 3115.98,1871 3171.98,1927 3171.98,2079 3071.98,2179 3071.98,2307 3095.98,2331 3095.98,2379 v1(3067.98,2407) ; v1(4283.98,2227) v1(4283.98,2403)
PIN34: U1.59 XIO.15 | length 2545.4
  Top Layer w8: U1.59@2307.78,1675.42 2311.98,1675 2351.98,1675 2359.98,1667 2415.98,1667 2419.98,1663 2743.98,1663 2747.98,1667 2909.98,1667 2921.98,1655 3007.98,1655 v1(3043.98,1691) ; v1(3519.98,1895) 3547.98,1895 3555.98,1903 3695.98,1903 3735.98,1863 4271.98,1863 4359.98,1951 4379.98,1951 4467.98,2039 XIO.15@4507.98,2039
  Bottom Layer w8: v1(3043.98,1691) 3043.98,1743 3071.98,1771 3111.98,1771 3255.98,1915 3255.98,1963 3287.98,1995 3419.98,1995 v1(3519.98,1895)
PIN35: U1.60 XIO.16 | length 2649.5
  Top Layer w8: U1.60@2307.78,1655.73 2347.25,1655.73 2351.98,1651 2407.98,1651 2411.98,1647 2755.98,1647 2759.98,1651 2899.98,1651 2911.98,1639 3015.98,1639 3035.98,1659 3071.98,1659 v1(3095.98,1683) ; v1(3479.98,1739) 3487.98,1731 3599.98,1731 3699.98,1831 4295.98,1831 4335.98,1871 4415.98,1871 4455.98,1911 4455.98,1979 4463.98,1987 4555.98,1987 XIO.16@4607.98,2039
  Bottom Layer w8: v1(3095.98,1683) 3151.98,1683 3255.98,1787 3343.98,1787 3361.98,1769 3361.98,1715 3382.65,1693.8 3401.45,1675 3419.98,1675 3479.98,1735 v1(3479.98,1739)
PIN36: U1.116 XIO.17 | length 1508.5
  Top Layer w8: U1.116@3158.18,1557.31 3158.18,1556.8 3161.98,1557 3189.98,1557 3215.98,1583 3239.98,1583 3299.98,1643 3391.98,1643 3459.98,1711 3603.98,1711 3707.98,1815 4303.98,1815 4343.98,1855 4423.98,1855 XIO.17@4507.98,1939
PIN37: U1.63 XIO.18 | length 2848
  Top Layer w8: U1.63@2307.78,1596.68 2311.98,1595 2359.98,1595 2367.98,1587 2871.98,1587 2907.98,1623 3039.98,1623 v1(3043.98,1627) ; v1(3223.98,1995) 3535.98,1995 v1(3543.98,1987) ; v1(3603.98,1847) 4283.98,1847 4339.98,1903 v1(4403.98,1903)
  Bottom Layer w8: v1(3043.98,1627) 3003.98,1627 2971.98,1659 2971.98,1723 3051.98,1803 3095.98,1803 3223.98,1931 v1(3223.98,1995) ; v1(3543.98,1987) 3603.98,1927 v1(3603.98,1847) ; v1(4403.98,1903) 4415.98,1891 4559.98,1891 XIO.18@4607.98,1939
PIN38: U1.64 XIO.19 | length 2345.9
  Top Layer w8: U1.64@2307.78,1576.99 2353.99,1576.99 2359.98,1571 2879.98,1571 2915.98,1607 3023.98,1607 3031.98,1599 3055.98,1599 3071.98,1615 3071.98,1619 v1(3095.98,1643) ; v1(3339.98,1615) 3483.98,1615 3563.98,1695 3611.98,1695 3715.98,1799 4315.98,1799 4355.98,1839 XIO.19@4507.98,1839
  Bottom Layer w8: v1(3095.98,1643) 3111.98,1627 3327.98,1627 v1(3339.98,1615)
PIN39: U1.65 XIO.20 | length 2442
  Top Layer w8: U1.65@2307.78,1557.31 2349.67,1557.31 2351.98,1555 2887.98,1555 2923.98,1591 3015.98,1591 3035.98,1571 v1(3055.98,1571) ; v1(3267.98,1571) 3487.98,1571 3579.98,1663 3627.98,1663 3731.98,1767 4331.98,1767 4351.98,1787 v1(4403.98,1787)
  Bottom Layer w8: v1(3055.98,1571) 3191.98,1571 3199.98,1579 3259.98,1579 v1(3267.98,1571) ; v1(4403.98,1787) 4555.98,1787 XIO.20@4607.98,1839
PIN40: U1.66 XIO.21 | length 2406.1
  Top Layer w8: U1.66@2307.78,1537.62 2350.6,1537.62 2351.98,1539 2895.98,1539 2931.98,1575 3007.98,1575 3039.98,1543 3067.98,1543 3095.98,1571 v1(3095.98,1599) ; v1(3297.98,1599) 3315.98,1599 3327.98,1587 3479.98,1587 3571.98,1679 3619.98,1679 3723.98,1783 4323.98,1783 4363.98,1823 4423.98,1823 XIO.21@4507.98,1739
  Bottom Layer w8: v1(3095.98,1599) v1(3297.98,1599)
PIN41: U1.67 XIO.22 | length 2474.6
  Top Layer w8: U1.67@2307.78,1517.94 2362.92,1517.94 2367.98,1523 2903.98,1523 2939.98,1559 2999.98,1559 3031.98,1527 3095.98,1527 v1(3105.98,1537) ; v1(3227.98,1551) 3235.98,1543 3283.98,1543 3295.98,1555 3495.98,1555 3587.98,1647 3635.98,1647 3739.98,1751 4399.98,1751 4459.98,1691 4559.98,1691 XIO.22@4607.98,1739
  Bottom Layer w8: v1(3105.98,1537) 3119.98,1551 v1(3227.98,1551)
PIN42: U1.71 XIO.23 | length 2405.9
  Top Layer w8: U1.71@2307.78,1439.2 2344.18,1439.2 2351.98,1447 2351.98,1455 2363.98,1467 2423.98,1467 2463.98,1507 2911.98,1507 2947.98,1543 2991.98,1543 3023.98,1511 3075.98,1511 3091.98,1495 v1(3103.98,1495) ; v1(3227.98,1511) 3243.98,1527 3291.98,1527 3303.98,1539 3503.98,1539 3591.98,1627 3639.98,1627 3747.98,1735 4391.98,1735 4475.98,1651 4495.98,1651 XIO.23@4507.98,1639
  Bottom Layer w8: v1(3103.98,1495) 3123.98,1511 v1(3227.98,1511)
PIN43: U1.72 XIO.24 | length 4331.7
  Top Layer w8: U1.72@2307.78,1419.51 2303.98,1419 2359.98,1419 v1(2379.98,1439) ; v1(2391.98,1851) 2399.98,1847 2611.98,1847 2631.98,1867 2995.98,1867 v1(2999.98,1871) ; v1(3067.98,2367) 3103.98,2403 3191.98,2403 3223.98,2435 3251.98,2435 3315.98,2371 3399.98,2371 3407.98,2363 3775.98,2363 3799.98,2387 3943.98,2387 3959.98,2403 4039.98,2403 4059.98,2423 4151.98,2423 v1(4167.98,2407) ; v1(4191.98,2207) 4215.98,2183 4215.98,2143 4267.98,2091 4315.98,2091 4323.98,2099 4371.98,2099 4379.98,2091 4635.98,2091 4655.98,2071 4655.98,1687 XIO.24@4607.98,1639
  Bottom Layer w8: v1(2379.98,1439) 2379.98,1487 2507.98,1615 2507.98,1803 2463.98,1847 2399.98,1847 v1(2391.98,1851) ; v1(2999.98,1871) 3015.98,1887 3107.98,1887 3155.98,1935 3155.98,2071 3055.98,2171 3055.98,2355 v1(3067.98,2367) ; v1(4167.98,2407) 4171.98,2403 4171.98,2363 4159.98,2351 4159.98,2239 v1(4191.98,2207)
PIN44: U1.101 XIO.25 | length 2445.1
  Top Layer w8: v1(2887.98,1463) 2907.98,1463 2951.98,1419 2951.98,1383 2939.67,1370.69 U1.101@2939.67,1338.8 ; v1(3303.98,1395) 3307.98,1399 3519.98,1399 3783.98,1135 4175.98,1135 4327.98,1287 4327.98,1399 4467.98,1539 XIO.25@4507.98,1539
  Bottom Layer w8: v1(2887.98,1463) 2903.98,1463 2951.98,1415 2951.98,1383 2939.98,1371 2939.98,1271 2999.98,1211 3091.98,1211 3131.98,1255 3187.98,1255 3227.98,1295 3227.98,1347 3275.98,1395 v1(3303.98,1395)
PIN45: U1.100 XIO.26 | length 2338.6
  Top Layer w8: U1.100@2919.99,1338.8 2919.98,1339 2919.98,1375 2923.98,1379 v1(2923.98,1399) ; v1(3143.98,1219) 3143.98,1255 3255.98,1367 3527.98,1367 3775.98,1119 4187.98,1119 4347.98,1279 4347.98,1375 4463.98,1491 4559.98,1491 XIO.26@4607.98,1539
  Bottom Layer w8: v1(2923.98,1399) 2923.98,1263 2995.98,1191 3115.98,1191 v1(3143.98,1219)
PIN46: U1.99 XIO.27 | length 2404.3
  Top Layer w8: v1(2845.98,1463) 2895.98,1413 2895.98,1375 2900.3,1370.68 U1.99@2900.3,1338.8 ; v1(3271.98,1339) 3283.98,1351 3519.98,1351 3767.98,1103 4195.98,1103 4367.98,1275 4367.98,1347 4459.98,1439 XIO.27@4507.98,1439
  Bottom Layer w8: v1(2845.98,1463) 2895.98,1413 2895.98,1363 2907.98,1351 2907.98,1255 2991.98,1171 3155.98,1171 3263.98,1279 3263.98,1323 3271.98,1331 v1(3271.98,1339)
PIN47: U1.98 XIO.28 | length 2383.2
  Top Layer w8: v1(2863.98,1403) 2879.98,1387 2879.98,1339 U1.98@2880.62,1338.8 ; v1(3335.98,1323) 3347.98,1335 3511.98,1335 3759.98,1087 3891.98,1087 3951.98,1027 4147.98,1027 4387.98,1267 4387.98,1291 4483.98,1387 4555.98,1387 XIO.28@4607.98,1439
  Bottom Layer w8: v1(2863.98,1403) 2863.98,1367 2891.98,1339 2891.98,1247 2987.98,1151 3163.98,1151 v1(3335.98,1323)
PIN48: U1.97 XIO.29 | length 2409.7
  Top Layer w8: v1(2803.98,1463) 2835.98,1431 2835.98,1391 2860.93,1366.05 U1.97@2860.93,1338.8 ; v1(3375.98,1307) 3515.98,1307 3751.98,1071 3883.98,1071 3943.98,1011 4155.98,1011 4483.98,1339 XIO.29@4507.98,1339
  Bottom Layer w8: v1(2803.98,1463) 2835.98,1431 2835.98,1367 2875.98,1327 2875.98,1239 2983.98,1131 3199.98,1131 v1(3375.98,1307)
PIN49: U1.96 XIO.30 | length 2216.5
  Top Layer w8: U1.96@2841.25,1338.8 2839.98,1331 2839.98,1283 v1(2847.98,1275) ; v1(2891.98,1183) 2919.98,1155 3123.98,1155 3247.98,1279 3519.98,1279 3743.98,1055 3875.98,1055 3935.98,995 4163.98,995 4459.98,1291 4559.98,1291 XIO.30@4607.98,1339
  Bottom Layer w8: v1(2847.98,1275) 2847.98,1227 v1(2891.98,1183)
PIN50: U1.95 XIO.31 | length 2266.8
  Top Layer w8: v1(2807.98,1407) 2817.56,1397.58 2817.56,1377.42 2820.98,1374 U1.95@2821.56,1338.8 ; v1(2851.98,1183) 2895.98,1139 3131.98,1139 3255.98,1263 3511.98,1263 3735.98,1039 3867.98,1039 3927.98,979 4171.98,979 4399.98,1207 4431.98,1207 4463.98,1239 XIO.31@4507.98,1239
  Bottom Layer w8: v1(2807.98,1407) 2807.98,1387 2819.98,1375 2819.98,1215 v1(2851.98,1183)